# EAGLE board pcb (EAGLE 7.2.0)
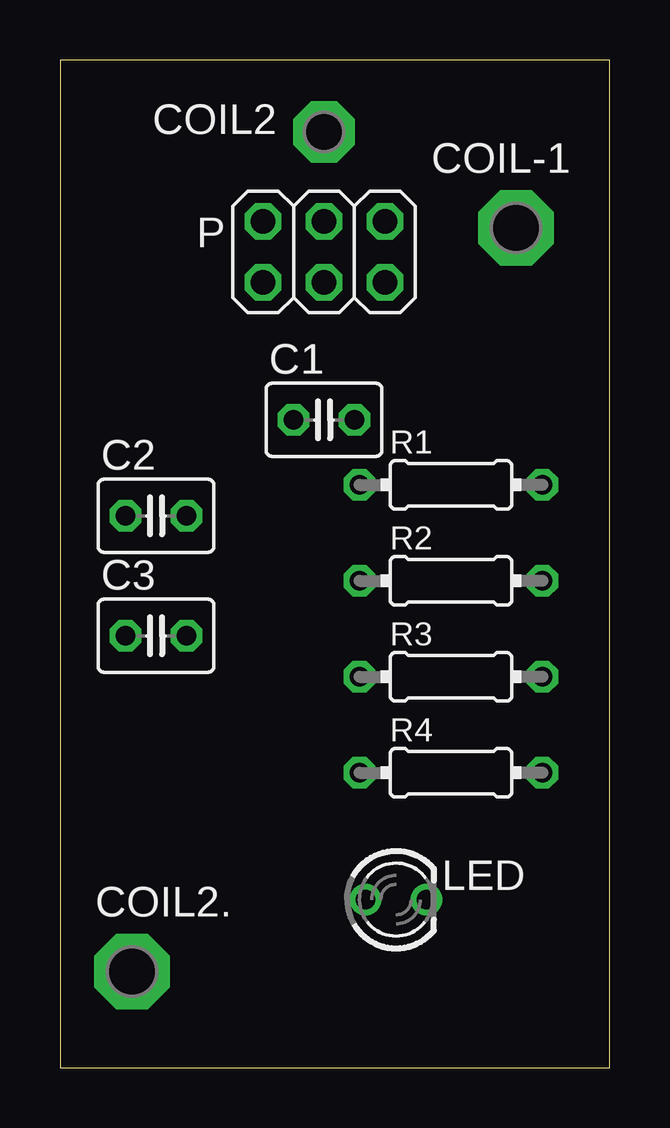
[diagram p0: board, top side]
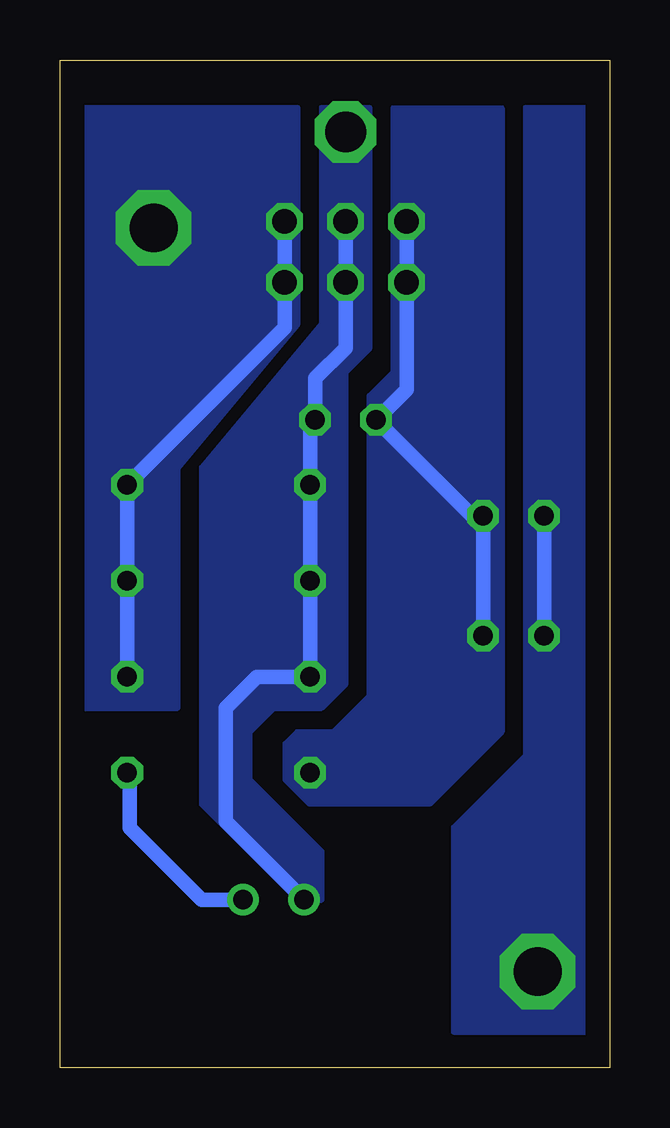
[diagram p1: board, bottom side, seen from below]

Size 22.9 x 42 mm. Coordinates in mm from the lower left corner, seen from the top.
Outline: 0,0 22.9,0 22.9,42 0,42 0,0
Copper layers (1*16): Top 0.035mm / dielectric 1.5mm / Bottom 0.035mm
Design rules "default": minimum track width 10mil, minimum drill 24mil, track to track 8mil, track to pad 8mil, pad to pad 8mil, via to via 8mil, smd to smd 8mil, copper to edge 40mil, drill to drill 8mil, minimum pad ring 10mil, minimum via ring 8mil, stop-mask expansion 4mil, vias tented up to drill 0mil, thermal gap 10mil

## Footprints (pad centres in the part's own frame; a part is rotated, then mirrored left to right if it is on the bottom)
C025-030X050 = drill 0.813 octagon: 1 -1.27,0; 2 1.27,0
P1-17 = drill 1.702 pad 2.54 octagon: TP 0,0
P1-20 = drill 2.007 pad 3.15 octagon: TP 0,0
LED3MM = drill 0.813: A -1.27,0; K 1.27,0
2X03 = drill 1.016 octagon: 1 -2.54,-1.27; 2 -2.54,1.27; 3 0,-1.27; 4 0,1.27; 5 2.54,-1.27; 6 2.54,1.27
0204/7 = drill 0.813 octagon: 1 -3.81,0; 2 3.81,0

## Placement (x,y rotation side)
C1  [C025-030X050]  11,27 0 top
C2  [C025-030X050]  4,23 0 top
C3  [C025-030X050]  4,18 0 top
COIL2  [P1-17]  11,39 0 top
COIL2.  [P1-20]  3,4 0 top
COIL-1  [P1-20]  19,35 0 top
LED  [LED3MM]  14,7 0 top
P  [2X03]  11,34 0 top
R1  [0204/7]  16.29,24.29 0 top
R2  [0204/7]  16.29,20.29 0 top
R3  [0204/7]  16.29,16.29 0 top
R4  [0204/7]  16.29,12.29 0 top

## Library data of the parts
C1-C3 R1-R4 = rcl
COIL2 COIL2. COIL-1 = testpad
LED = epic
P = pinhead

## Nets
S$1: COIL-1.TP P.5 P.6 R1.2 R2.2 R3.2
S$4: C1.2 COIL2.TP LED.A P.3 P.4 R1.1 R2.1 R3.1
S$5: LED.K R4.2
S$6: C2.1 C3.1 COIL2..TP
S$7: C1.1 C2.2 C3.2 P.1 P.2 R4.1

## Tracks (layer width: path | path; a pad name or v marks a point on that pad's centre or on a via)
S$1
  Bottom 0.61: P.6 P.5 13.54,30.85 R1.2 R2.2 R3.2
  pour Bottom (no thermals): 13,31 13,40 22,40 22,15 18,15 18,25
S$4
  Bottom 0.61: P.4 P.3 11,30 12.27,28.73 C1.2 12.48,26.79 R1.1 R2.1 R3.1 14.71,16.29 16,15 16,10.27 LED.A
  pour Bottom (isolate 0.254, no thermals): 12,40 12,31 17,25 17,11 13,7 12,7 12,9 15,12 15,14 14,15 12,15 11,16 11,29 10,30 10,40
S$5
  Bottom 0.61: LED.K 17,7 20,10 20,12.19 R4.2
S$6
  Bottom 0.61: C2.1 C3.1
  pour Bottom (no thermals): 1,40 3.5,40 3.5,13 6.5,10 6.5,1.5 1,1.5
S$7
  Bottom 0.61: C3.2 C2.2 5.73,23 C1.1 8.46,28.27 P.1 P.2
  pour Bottom (no thermals): 4.5,40 4.5,14 7.5,11 12.5,11 13.5,12 13.5,13.5 13,14 11.5,14 10,15.5 10,28 9,29 9,40